# EAGLE board 227_arrayrelay (EAGLE 9.6.0)
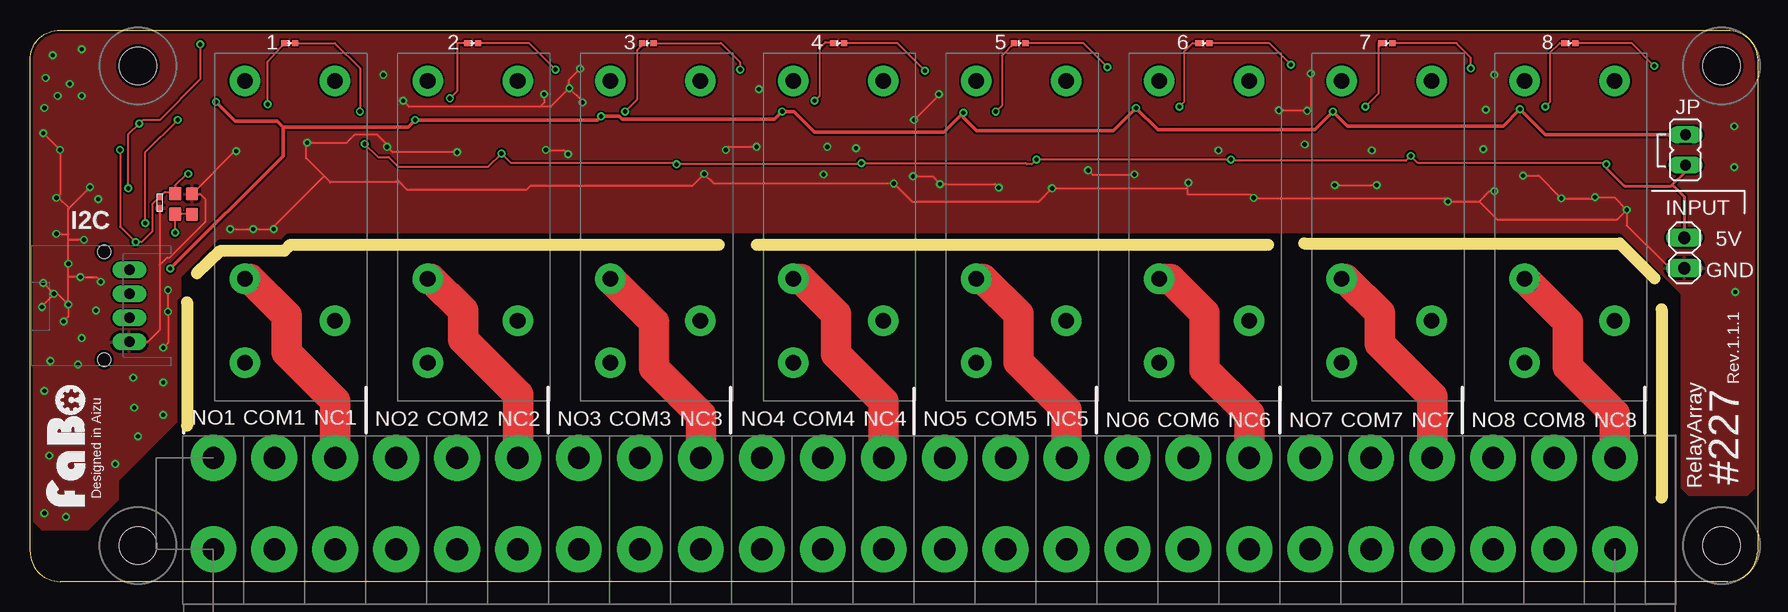
[diagram p0: board, top side]
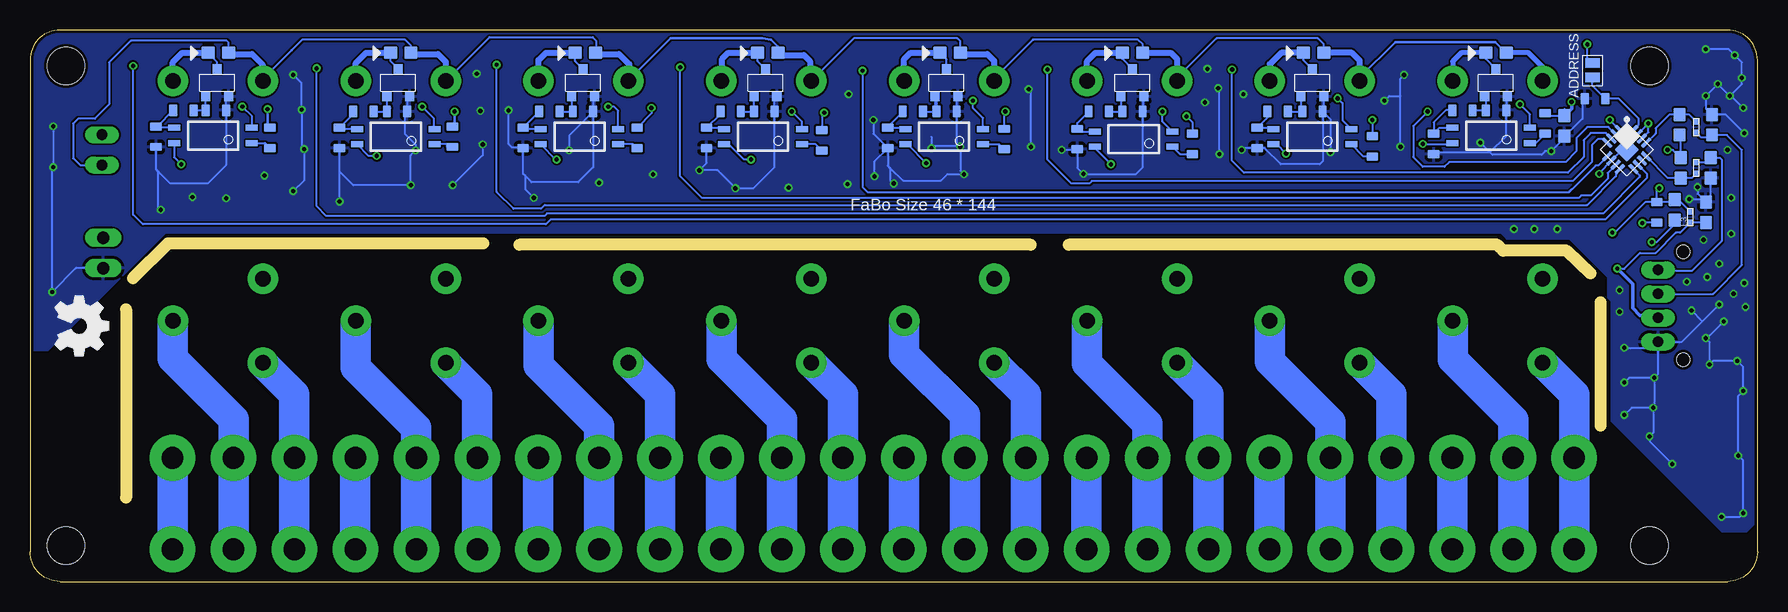
[diagram p1: board, bottom side, seen from below]

Size 144 x 46 mm. Coordinates in mm from the lower left corner, seen from the top.
Outline: 0,2.5 0,43.5 arc-90 2.5,46 141.5,46 arc-90 144,43.5 144,2.5 arc-90 141.5,0 2.5,0 arc-90 0,2.5
Copper layers (1*16): Top 0.035mm / dielectric 1.5mm / Bottom 0.035mm
Design rules "SeeedStudio_2layer_DRU_no_angle_20140221": minimum track width 6mil, minimum drill 12mil, track to track 6mil, track to pad 6mil, pad to pad 6mil, via to via 6mil, smd to smd 0mil, copper to edge 10mil, drill to drill 10mil, minimum pad ring 10mil, minimum via ring 6mil, stop-mask expansion 2mil, vias tented up to drill 100mil, thermal gap 10mil
Holes 3.1 mm at 9,3 9,43 141,43 141,3
bRestrict: 1 lines
Milling: 9 lines

## Footprints (pad centres in the part's own frame; a part is rotated, then mirrored left to right if it is on the bottom)
0603 = smd 1.1 x 1: 1 -0.85,0; 2 0.85,0
TBL004-508 = drill 1.8 pad 3.81: P$1 0,3.81; P$2 0,-3.81
0603' = smd 1.1 x 1: ANODE -0.85,0; CATHODE 0.85,0
NXP-PCAL6408A = smd 1 x 0.3: 1 -1.55,0.75; 2 -1.55,0.25; 3 -1.55,-0.25; 4 -1.55,-0.75; 9 1.55,-0.75; 10 1.55,-0.25; 11 1.55,0.25; 12 1.55,0.75 | smd 0.3 x 1: 5 -0.75,-1.55; 6 -0.25,-1.55; 7 0.25,-1.55; 8 0.75,-1.55; 13 0.75,1.55; 14 0.25,1.55; 15 -0.25,1.55; 16 -0.75,1.55 | smd 1.5 x 1.5: 17 0,0
FABO_BRICK_I2C_S04B-PASK-2_LONG = drill 0.9 pad 1.422 long: GND -3,0; SCL 3,0; SDA 1,0; VCC -1,0 | hole 1.1: 4.5,2.1; -4.5,2.1
JP1 = drill 0.914 long: 1 0,-1.27; 2 0,1.27
1X02 = drill 1.016 long: 1 -1.27,0; 2 1.27,0
0402 = smd 0.5 x 0.5: P$1 -0.46,0; P$2 0.46,0
0402-NO_SILK = smd 0.5 x 0.5: ANODE -0.46,0; CATHODE 0.46,0
SUPERSOT-3 = smd 0.76 x 0.76: D 0,1.15; G -0.95,-1.15; S 0.95,-1.15
0603-NARROW = smd 0.71 x 1: 1 -0.85,0; 2 0.85,0
G2RL-1 = drill 1.3 pad 2.54: 1 -11.75,-3.75; 2 4.75,-3.75; 3 11.75,-3.75; 4 8.25,3.75; 5 -11.75,3.75
SMD-JUMPER-2-OPEN = smd 0.8 x 1.2: 1 -0.6,0; 2 0.6,0
11-3C1 = smd 1 x 0.5: 1 -3.24,0.635; 2 -3.24,-0.635; 3 3.24,-0.635; 4 3.24,0.635

## Placement (x,y rotation side)
C1  10uF  [0603]  13.51,31.48 270 top
C2  0.1uF  [0603]  16.1,38 90 bottom
C3  10uF  [0603]  4.3,30.8 270 bottom
C4  33pF  [0603]  3.8,38.1 270 bottom
C5  10uF  [0603]  6.9,31 90 bottom
C6  33pF  [0603]  3.9,34.5 90 bottom
C7  33pF  [0603]  6.5,38.1 90 bottom
C8  33pF  [0603]  6.4,34.5 270 bottom
C9  0.1uF  [0603]  12.1,31.5 270 top
COM1  TBL004-508  [TBL004-508]  20.36,6.5 0 top
COM2  TBL004-508  [TBL004-508]  35.6,6.5 0 top
COM3  TBL004-508  [TBL004-508]  50.84,6.5 0 top
COM4  TBL004-508  [TBL004-508]  66.08,6.5 0 top
COM5  TBL004-508  [TBL004-508]  81.32,6.5 0 top
COM6  TBL004-508  [TBL004-508]  96.56,6.5 0 top
COM7  TBL004-508  [TBL004-508]  111.8,6.5 0 top
COM8  TBL004-508  [TBL004-508]  127.04,6.5 0 top
D1  1N4188  [0603']  21.8,44.1 0 bottom
D2  1N4188  [0603']  37,44.1 0 bottom
D3  1N4188  [0603']  52.1,44.1 0 bottom
D4  1N4188  [0603']  67.3,44.1 0 bottom
D5  1N4188  [0603']  82.5,44.1 0 bottom
D6  1N4188  [0603']  97.7,44.1 0 bottom
D7  1N4188  [0603']  113.1,44.1 0 bottom
D8  1N4188  [0603']  128.3,44.1 0 bottom
IC1  [NXP-PCAL6408A]  10.9,36.02 315 bottom
J1  [FABO_BRICK_I2C_S04B-PASK-2_LONG]  8.29,23 90 top
JP2  [JP1]  138,36 180 top
JP3  [1X02]  137.9,27.4 270 top
L1  [0402]  5.1,34.5 270 bottom
L2  [0402]  5.1,37.9 90 bottom
L3  [0402]  5.6,30.4 90 bottom
L4  [0402]  10.8,31.6 90 top
LED1  [0402-NO_SILK]  21.66,44.9 0 top
LED2  [0402-NO_SILK]  36.9,44.9 0 top
LED3  [0402-NO_SILK]  51.5,44.9 0 top
LED4  [0402-NO_SILK]  67.38,44.9 0 top
LED5  [0402-NO_SILK]  82.5,44.9 0 top
LED6  [0402-NO_SILK]  97.86,44.9 0 top
LED7  [0402-NO_SILK]  113.1,44.9 0 top
LED8  [0402-NO_SILK]  128.34,44.9 0 top
M1  MOSFET-N_FDN335N  [SUPERSOT-3]  21.8,41.6 0 bottom
M2  MOSFET-N_FDN335N  [SUPERSOT-3]  37.1,41.6 0 bottom
M3  MOSFET-N_FDN335N  [SUPERSOT-3]  52.1,41.6 0 bottom
M4  MOSFET-N_FDN335N  [SUPERSOT-3]  67.6,41.6 0 bottom
M5  MOSFET-N_FDN335N  [SUPERSOT-3]  82.7,41.6 0 bottom
M6  MOSFET-N_FDN335N  [SUPERSOT-3]  97.9,41.6 0 bottom
M7  MOSFET-N_FDN335N  [SUPERSOT-3]  113.3,41.6 0 bottom
M8  MOSFET-N_FDN335N  [SUPERSOT-3]  128.4,41.6 0 bottom
NC1  TBL004-508  [TBL004-508]  25.44,6.5 0 top
NC2  TBL004-508  [TBL004-508]  40.68,6.5 0 top
NC3  TBL004-508  [TBL004-508]  55.92,6.5 0 top
NC4  TBL004-508  [TBL004-508]  71.16,6.5 0 top
NC5  TBL004-508  [TBL004-508]  86.4,6.5 0 top
NC6  TBL004-508  [TBL004-508]  101.64,6.5 0 top
NC7  TBL004-508  [TBL004-508]  116.88,6.5 0 top
NC8  TBL004-508  [TBL004-508]  132.12,6.5 0 top
R1  1.8K  [0603-NARROW]  24.6,39.3 0 bottom
R2  10K  [0603-NARROW]  21.8,39.3 180 bottom
R3  1K  [0603-NARROW]  27,36.5 90 bottom
R4  1K  [0603-NARROW]  17.7,38.2 270 bottom
R5  1.8K  [0603-NARROW]  40,39.2 0 bottom
R6  10K  [0603-NARROW]  37.1,39.2 180 bottom
R7  1K  [0603-NARROW]  41.7,37 90 bottom
R8  1K  [0603-NARROW]  32.1,36.3 270 bottom
R9  10k  [0603-NARROW]  13.55,40.28 0 bottom
R10  1.8K  [0603-NARROW]  54.9,39.2 0 bottom
R11  10K  [0603-NARROW]  52.1,39.2 180 bottom
R12  1K  [0603-NARROW]  56.7,36.9 90 bottom
R13  1K  [0603-NARROW]  47.1,36.5 270 bottom
R14  1.8K  [0603-NARROW]  70.4,39.2 0 bottom
R15  10K  [0603-NARROW]  67.6,39.2 180 bottom
R16  1K  [0603-NARROW]  72.5,37 90 bottom
R17  1K  [0603-NARROW]  62.8,36.9 270 bottom
R18  1.8K  [0603-NARROW]  85.6,39.2 0 bottom
R19  10K  [0603-NARROW]  82.8,39.2 180 bottom
R20  1K  [0603-NARROW]  87.6,37 90 bottom
R21  1K  [0603-NARROW]  78,36.8 270 bottom
R22  1.8K  [0603-NARROW]  100.7,39.2 0 bottom
R23  10K  [0603-NARROW]  97.9,39.2 180 bottom
R24  1K  [0603-NARROW]  102.9,37 90 bottom
R25  1K  [0603-NARROW]  93.4,37 270 bottom
R26  1.8K  [0603-NARROW]  116.2,39.2 0 bottom
R27  10K  [0603-NARROW]  113.4,39.2 180 bottom
R28  1K  [0603-NARROW]  118.2,37 90 bottom
R29  1K  [0603-NARROW]  108.8,37.1 270 bottom
R30  1.8K  [0603-NARROW]  131.2,39.3 0 bottom
R31  10K  [0603-NARROW]  128.5,39.3 180 bottom
R32  1K  [0603-NARROW]  133.5,37.1 90 bottom
R33  1K  [0603-NARROW]  124,37 270 bottom
R34  10k  [0603-NARROW]  8.4,30.8 90 bottom
RL1  G2RL-1  [G2RL-1]  21.66,30 270 top
RL2  G2RL-1  [G2RL-1]  36.9,30 270 top
RL3  G2RL-1  [G2RL-1]  52.14,30 270 top
RL4  G2RL-1  [G2RL-1]  67.38,30 270 top
RL5  G2RL-1  [G2RL-1]  82.62,30 270 top
RL6  G2RL-1  [G2RL-1]  97.86,30 270 top
RL7  G2RL-1  [G2RL-1]  113.1,30 270 top
RL8  G2RL-1  [G2RL-1]  128.34,30 270 top
SJ1  OPEN  [SMD-JUMPER-2-OPEN]  13.76,42.63 270 bottom
U1  TLP291A  [11-3C1]  37.1,37.1 180 bottom
U2  TLP291A  [11-3C1]  52,36.9 180 bottom
U3  TLP291A  [11-3C1]  67.8,37.1 180 bottom
U4  TLP291A  [11-3C1]  22.2,37.2 180 bottom
U5  TLP291A  [11-3C1]  82.9,37.1 180 bottom
U6  TLP291A  [11-3C1]  98.2,37.1 180 bottom
U7  TLP291A  [11-3C1]  113.5,37.1 180 bottom
U8  TLP291A  [11-3C1]  128.74,37.2 180 bottom
U$2  [LOGO_OSHW_M]  139.9,21.3 270 bottom
U$4  [LOGO_FABO_MS]  4.97,11.33 90 top
U$7  TBL004-508  [TBL004-508]  15.28,6.5 0 top
U$9  TBL004-508  [TBL004-508]  30.52,6.5 0 top
U$12  TBL004-508  [TBL004-508]  45.76,6.5 0 top
U$15  TBL004-508  [TBL004-508]  61,6.5 0 top
U$18  TBL004-508  [TBL004-508]  76.24,6.5 0 top
U$21  TBL004-508  [TBL004-508]  91.48,6.5 0 top
U$24  TBL004-508  [TBL004-508]  106.72,6.5 0 top
U$27  TBL004-508  [TBL004-508]  121.96,6.5 0 top

## Library data of the parts
C1-C9 = FaBo-Capacitor
COM1-COM8 NC1-NC8 U$7 U$9 U$12 U$15 U$18 U$21 U$24 U$27 = FaBo-Terminal
D1-D8 = FaBo-Diode
IC1 = FaBo-Mems
J1 = FaBo-Template
JP2 = jumper
JP3 = pinhead
L1-L4 = FaBo-Coil
LED1-LED8 = FaBo-LED
M1-M8 = FaBo-Mosfet
R1-R34 = FaBo-Resistors
RL1-RL8 = FaBo-Relay
SJ1 = FaBo-Supply
U1-U8 = FaBo_Photocoupler
U$2 = FaBo-Logo
U$4 = FaBo-etc

## Nets
+5V: D1.CATHODE D2.CATHODE D3.CATHODE D4.CATHODE D5.CATHODE D6.CATHODE D7.CATHODE D8.CATHODE JP2.2 JP3.1 RL1.1 RL2.1 RL3.1 RL4.1 RL5.1 RL6.1 RL7.1 RL8.1 U1.4 U2.4 U3.4 U4.4 U5.4 U6.4 U7.4 U8.4
ADDRESS: IC1.16 R9.2 SJ1.2
GND: C1.1 C2.1 C3.1 C4.1 C6.1 J1.GND JP3.2 L4.P$1 M1.S M2.S M3.S M4.S M5.S M6.S M7.S M8.S R2.1 R3.1 R6.1 R7.1 R9.1 R11.1 R12.1 R15.1 R16.1 R19.1 R20.1 R23.1 R24.1 R27.1 R28.1 R31.1 R32.1
GPIO0: IC1.2 LED1.CATHODE
GPIO1: IC1.3 LED2.CATHODE
GPIO2: IC1.4 LED3.CATHODE
GPIO3: IC1.5 LED4.CATHODE
GPIO4: IC1.7 LED5.CATHODE
GPIO5: IC1.8 LED6.CATHODE
GPIO6: IC1.9 LED7.CATHODE
GPIO7: IC1.10 LED8.CATHODE
N$2: D1.ANODE M1.D RL1.5
N$3: R1.1 R3.2 U4.3
N$4: M1.G R1.2 R2.2
N$5: LED1.ANODE U4.2
N$6: D2.ANODE M2.D RL2.5
N$7: R4.2 U4.1
N$8: NC1.P$1 NC1.P$2 RL1.2
N$9: COM1.P$1 COM1.P$2 RL1.4
N$10: RL1.3 U$7.P$1 U$7.P$2
N$11: R5.1 R7.2 U1.3
N$12: M2.G R5.2 R6.2
N$13: NC2.P$1 NC2.P$2 RL2.2
N$14: COM2.P$1 COM2.P$2 RL2.4
N$15: RL2.3 U$9.P$1 U$9.P$2
N$16: LED2.ANODE U1.2
N$17: R8.2 U1.1
N$18: D3.ANODE M3.D RL3.5
N$19: R10.1 R12.2 U2.3
N$20: M3.G R10.2 R11.2
N$21: NC3.P$1 NC3.P$2 RL3.2
N$22: COM3.P$1 COM3.P$2 RL3.4
N$23: RL3.3 U$12.P$1 U$12.P$2
N$24: LED3.ANODE U2.2
N$25: R13.2 U2.1
N$26: D4.ANODE M4.D RL4.5
N$27: R14.1 R16.2 U3.3
N$28: M4.G R14.2 R15.2
N$29: NC4.P$1 NC4.P$2 RL4.2
N$30: COM4.P$1 COM4.P$2 RL4.4
N$31: RL4.3 U$15.P$1 U$15.P$2
N$32: LED4.ANODE U3.2
N$33: R17.2 U3.1
N$34: D5.ANODE M5.D RL5.5
N$35: R18.1 R20.2 U5.3
N$36: M5.G R18.2 R19.2
N$37: NC5.P$1 NC5.P$2 RL5.2
N$38: COM5.P$1 COM5.P$2 RL5.4
N$39: RL5.3 U$18.P$1 U$18.P$2
N$40: LED5.ANODE U5.2
N$41: R21.2 U5.1
N$42: D6.ANODE M6.D RL6.5
N$43: R22.1 R24.2 U6.3
N$44: M6.G R22.2 R23.2
N$45: NC6.P$1 NC6.P$2 RL6.2
N$46: COM6.P$1 COM6.P$2 RL6.4
N$47: RL6.3 U$21.P$1 U$21.P$2
N$48: LED6.ANODE U6.2
N$49: R25.2 U6.1
N$50: D7.ANODE M7.D RL7.5
N$51: R26.1 R28.2 U7.3
N$52: M7.G R26.2 R27.2
N$53: NC7.P$1 NC7.P$2 RL7.2
N$54: COM7.P$1 COM7.P$2 RL7.4
N$55: RL7.3 U$24.P$1 U$24.P$2
N$56: LED7.ANODE U7.2
N$57: R29.2 U7.1
N$58: D8.ANODE M8.D RL8.5
N$59: R30.1 R32.2 U8.3
N$60: M8.G R30.2 R31.2
N$61: NC8.P$1 NC8.P$2 RL8.2
N$62: COM8.P$1 COM8.P$2 RL8.4
N$63: RL8.3 U$27.P$1 U$27.P$2
N$64: LED8.ANODE U8.2
N$65: R33.2 U8.1
N$66: IC1.1 R34.1
N$70: C8.2 IC1.12 L1.P$2
N$71: C7.2 IC1.13 L2.P$2
N$72: C1.2 C5.2 C9.2 IC1.14 IC1.15 L3.P$2 R34.2 SJ1.1
N$73: C5.1 C7.1 C8.1 C9.1 IC1.6 IC1.17 L4.P$2
SCL: C6.2 J1.SCL L1.P$1
SDA: C4.2 J1.SDA L2.P$1
VCC: C2.2 C3.2 J1.VCC JP2.1 L3.P$1 R4.1 R8.1 R13.1 R17.1 R21.1 R25.1 R29.1 R33.1

## Tracks (layer width: path | path; a pad name or v marks a point on that pad's centre or on a via)
+5V  (via drill 0.35)
  Top 0.152: v131.4,34.8 131.3,34.9 115.7,34.9 v115.1,35.5 114.7,35.1 100.2,35.1 v100.1,35.2 v83.9,35.2 83.5,34.8 83.1,34.8 83,34.9 v69.3,34.9 69.2,34.8 v53.9,34.8 53.8,34.9 40.1,34.9 v39.3,35.7 38.2,34.6 30.7,34.6 29.9,35.4 29,35.4 v27.9,36.5
  Top 0.254: v131.4,34.8 131.4,34.5 132.9,33 136.8,33 136.9,33.1 | 136.9,33.1 138,34.2 JP2.2 | 136.9,33.1 137.9,32.1 JP3.1
  Bottom 0.152: U8.4 131.98,35.38 v131.4,34.8 | U1.4 40.06,36.47 v39.3,35.7 | v53.9,34.8 55.24,36.14 U2.4 | U3.4 70.86,36.47 v69.3,34.9 | v83.9,35.2 84.5,35.2 85.77,36.47 U5.4 | v100.1,35.2 100.14,35.16 U6.4 | U7.4 115.78,35.5 v115.1,35.5 | 33.3,41.9 RL2.1 | 109.35,41.85 RL7.1 105.7,45.4 97.1,45.4 96.8,45.1 96.8,44.1 | U4.4 25.5,36.5 v27.9,36.5 | 60.4,45.2 51.65,45.2 51.25,44.8 D3.CATHODE 50.74,44.1 | RL3.1 48.52,41.88 45.1,45.3 36.65,45.3 36.15,44.8 D2.CATHODE | 81.22,44.1 D5.CATHODE | D4.CATHODE 66.45,45.05 66.7,45.3 75.32,45.3 78.81,41.81 RL5.1 | 111.7,44.1 D7.CATHODE 112.25,44.7 112.75,45.2 121.3,45.2 122.2,44.3 | 126.94,44.1 D8.CATHODE 127.45,44.95 127.6,45.1 135.6,45.1 137.4,43.3 137.4,39.8 138.6,38.6 140,38.6 140.4,38.2 140.4,35.3 139.83,34.73 JP2.2 | 96.46,44.1 96.8,44.1 | 96.8,44.1 D6.CATHODE
  Bottom 0.2: 30.2,45 33.15,42.05 RL2.1
  Bottom 0.203: RL8.1 124.62,41.78 124.67,41.83 122.2,44.3 | RL4.1 63.74,41.86 60.4,45.2 | D1.CATHODE 21.85,45 30.2,45 | D2.CATHODE 36.45,44.2 | D5.CATHODE 81.65,44.6 82.22,45.17 82.95,45.3 90.6,45.3 94.05,41.85 94.13,41.77 RL6.1
  Bottom 0.406: RL1.1 17.91,42.91 19.1,44.1 D1.CATHODE
  Bottom 0.508: RL2.1 33.15,43.45 33.8,44.1 D2.CATHODE | D8.CATHODE 127.35,44 125.5,44 124.62,43.12 124.62,41.78 | D7.CATHODE 112.15,44 110,44 109.35,43.35 RL7.1 | D6.CATHODE 96.75,44 94.9,44 94.05,43.15 94.05,41.85 | D5.CATHODE 81.45,43.9 79.5,43.9 79,43.4 79,42 78.81,41.81 | D4.CATHODE 66.35,44 64.2,44 63.63,43.43 RL4.1 | D3.CATHODE 48.9,44.1 48.39,43.59 RL3.1
ADDRESS
  Bottom 0.152: IC1.16 9.9,38.09 9.9,38.6 11.58,40.28 R9.2 13.76,41.34 SJ1.2
GND  (via drill 0.35)
  Top 0.152: 30.7,33.4 30.8,33.3 | 30.8,33.3 31.4,32.7 41.4,32.7 41.7,33 55.2,33 v56.2,34 57,33.2 v72,33.2 73.5,31.7 84.1,31.7 v85.2,32.8 96.5,32.8 | 120.8,31.7 v118.2,31.7 117.9,32 v102,32 101.7,32.3 96.5,32.3 96.5,32.8 | 120.8,31.7 122.3,30.2 132.3,30.2 v133.1,31 | v133.1,31 133.1,29.7 136.67,26.13 JP3.2 | v35.6,35.8 30.21,35.8 v29.76,36.26 29.76,36.44 28.9,37.3 27.1,37.3 26.4,36.6 v23.1,36.6 23,36.5 23,35.3 24.5,33.8 | v44.96,41.16 43.4,39.6 42.5,39.6 | v31.1,40.1 31.6,39.6 42.5,39.6 | v58,36 58.26,36.26 v60.56,36.26 | v73.6,33.8 75.21,33.8 v75.86,33.16 80.46,33.16 v80.76,32.86 | v75.76,40.66 75.76,40.56 v73.7,38.5 | v88.2,34.3 88.54,33.96 v92.06,33.96 | 96.5,32.8 96.5,33.2 v96.56,33.26 | v106.76,42.36 106.76,39.56 106.5,39.3 | 106.5,39.3 v106.46,39.26 | v104.1,39.3 106.5,39.3 | v108.76,33.06 v112.26,33.06 | 120.8,31.7 121.66,32.56 v122.06,32.56 | v133.1,31 132.04,32.06 v130.46,32.06 130.36,31.96 v127.66,31.96 125.76,33.86 v124.46,33.86 | v3.2,23.1 3.2,25.4 | 3.2,25.4 v3.2,26.5 3.2,28.4 | 3.2,28.4 3.2,29 | 3.2,29 3.2,31.1 3.25,31.15 | 3.25,31.15 v5,32.9 | 3.25,31.15 2.4,32 v2.2,32 2.5,32.3 v2.5,36 v1.1,37.4 | v2.2,29 3.2,29 | 3.2,25.4 v4.2,25.4 5.5,25.4 v5.9,25 | v1,22.9 1,23 v2,24 | v2,24 v1.1,24.9 | v2,24 2.3,24 v3.2,23.1 | v3.2,23.1 3.2,22.1 v2.8,21.7 | L4.P$1 10.8,26.4 | 10.8,26.4 10.8,21 9.8,20 J1.GND | 10.8,26.4 11.4,27 11.6,27 14.6,30 14.6,31.9 14.17,32.33 C1.1 17.08,35.9 v17.2,35.9 | v4.5,28.5 3.3,28.5 3.2,28.4 | v43,36 44.51,36 v44.86,35.66 | 30.8,33.3 25,33.3 24.5,33.8 | v11.5,24.3 v11.5,22.5 11.5,19.9 v11.1,19.5 | v16.7,29.4 v18.6,29.4 v20.3,29.4 20.3,29.6 24.5,33.8 | v42.86,40.66 42.86,39.96 42.5,39.6
  Top 0.152: v44.96,41.16 44.96,41.86 v45.86,42.76 | v44.96,41.16 46.06,40.06 v46.06,39.96
  Bottom 0.152: 41.5,35.95 R7.1 | 66.85,39.3 66.78,39.23 | 66.78,39.23 R15.1 | R16.1 72.5,34.7 72.3,34.5 | 72.3,34.5 72.3,33.5 v72,33.2 | 82.15,39.4 R19.1 | 97.25,39.4 R23.1 | 127.85,39.5 R31.1 | R31.1 127.65,34.75 129.2,33.2 132.3,33.2 133.3,34.2 | 133.3,34.2 133.5,34.4 R32.1 | 112.76,38.99 112.85,38.9 | R23.1 97.05,34.55 98.3,33.3 102.2,33.3 102.7,33.8 | 102.7,33.8 102.9,34 R24.1 102.95,36.2 103.8,36.2 104.1,36.5 v104.1,39.3 | R19.1 81.95,34.55 83.7,32.8 v85.2,32.8 86.7,34.3 v88.2,34.3 87.6,34.9 R20.1 | 72.3,34.5 71.2,33.4 68.1,33.4 67.54,33.96 v66.16,33.96 66.46,34.26 v66.46,36.26 | R6.1 36.25,35.05 36.5,34.8 39.75,34.8 41.1,36.15 R7.1 | v102,32 102.7,32.7 102.7,33.8 | v118.2,31.7 R28.1 118.2,34.2 117.06,33.06 v112.26,33.06 112.26,35.56 v111.86,35.96 111.86,36.46 112.76,37.36 112.76,38.99 | v133.1,31 133.3,31.2 133.3,34.2 | v29.76,36.26 29.76,40.5 | 29.76,40.5 29.76,41.96 v29.46,42.26 | R6.1 35.6,38.55 v35.6,35.8 | v44.86,35.66 44.86,41.06 v44.96,41.16 | v31.1,40.1 30.7,40.5 29.76,40.5 | v60.56,36.26 60.56,40.86 v60.76,41.06 | v58,36 56.75,36 R12.1 56.7,34.5 v56.2,34 51.8,34 51.25,34.55 R11.1 51.25,40.35 M3.S | v73.6,33.8 73.6,35.05 R16.1 | v73.7,38.5 73.7,37.35 R16.1 | R23.1 99.06,37.19 v99.06,35.96 | R27.1 112.58,39.17 | 112.58,39.17 112.76,38.99 | v122.06,32.56 121.16,33.46 v121.16,36.06 121.36,36.26 v121.36,39.36 121.36,41.56 v122.06,42.26 | 68.86,37.09 68.86,36.3 | 68.86,36.3 v68.86,36.16 | 66.46,38.91 R15.1 | M1.S 20.95,40.35 R2.1 21,39.25 21,37.1 22.3,35.8 | R3.1 26.85,35.8 22.3,35.8 | C6.1 3.9,32.05 C3.1 4.55,31.9 | 4.6,21.7 6.3,20 J1.GND 8.29,19.8 | 4.6,21.7 v3.2,23.1 | v5,32.9 5,32.35 4.55,31.9 | v1.1,37.4 2.65,38.95 C4.1 4.3,39.45 v4.3,40.5 v3.3,41.5 v2.3,40.5
  Bottom 0.152: v1.2,39.5 2.2,40.5 v2.3,40.5 | R9.1 14.6,40.08 14.6,38.6 16.05,37.15 C2.1 16.1,37 v17.2,35.9 17.7,35.9 18,35.6 22.1,35.6 22.3,35.8 | v5.7,31.9 4.55,31.9 | R7.1 42.85,36.15 v43,36 | M4.S 66.78,40.33 66.78,39.23 | v66.46,36.26 66.5,36.3 68.86,36.3 | v66.46,36.26 66.75,36.55 R15.1 | v3,5.4 1.5,5.4 v1.2,5.7 1.2,10.1 v1.6,10.5 1.6,15.5 v1.2,15.9 1.2,17.9 v1.7,18.4 3.7,18.4 v4,18.1 4,20 v4.3,20.3 4.2,20.3 v2.8,21.7 | v8.6,17 10.7,17 v11.1,16.6 | v8.6,17 8.6,14.6 v8.7,14.5 | v8.7,14.5 8.7,12.4 v9,12.1 9,11.7 v7.1,9.8 | v8.7,14.5 10.5,14.5 v11.1,13.9 | v8.6,17 8.29,17.32 8.29,19.8 | v11.1,19.5 8.59,19.5 8.29,19.8 | v5.5,22.6 4.6,21.7 | R19.1 81.95,40.25 M5.S | M6.S 97.05,40.35 R23.1 | R31.1 127.65,40.25 M8.S | 22.3,35.8 v23.1,36.6 | R6.1 36.15,39.3 M2.S | M7.S 112.58,40.23 112.58,39.17 | v2.3,40.5 1.3,41.5 v1.3,42 1.3,43.3 v1.9,43.9 2.4,44.4 v4.3,44.4 | JP3.2 140.18,26.13 v142.16,24.16 142.16,34.46 v142.06,34.56 v142.06,37.96 | v106.26,36.46 106.26,35.56 v108.76,33.06
  pour Bottom: -1,45.1 1.8,47.9 144.4,47.9 146,46.3 146,19.6 145.7,19.3 142.5,19.3 132.7,29.1 21.4,29.1 20.9,28.6 15.7,28.6 12.5,25.4 12.5,23.7 12.2,23.4 12.2,13.4 3,4.2 0.9,4.2 -1,6.1
  pour Top: -0.5,44.9 2.9,48.3 144.6,48.3 146.6,46.3 146.6,26.5 145.1,25 145.1,9.2 143.1,7.2 138.3,7.2 137.7,7.8 137.7,24 132.6,29.1 21.4,29.1 20.9,28.6 15.7,28.6 12.5,25.4 12.5,23.8 12.2,23.5 12.2,13.3 7.3,8.4 7.3,6.8 4.8,4.3 1,4.3 -0.5,5.8
GPIO0  (via drill 0.35)
  Top 0.152: LED1.CATHODE 25.4,44.9 27.5,42.8 v27.5,39.2
  Bottom 0.152: v27.5,39.2 28.7,38 28.7,35.4 27.9,34.6 26.1,34.6 25.7,35 16,35 15.1,35.9 15.1,37 14.2,37.9 12.42,37.9 IC1.2
GPIO1  (via drill 0.35)
  Top 0.152: v43.8,42.7 41.6,44.9 LED2.CATHODE
  Bottom 0.152: v43.8,42.7 43.8,35.1 42.8,34.1 15.8,34.1 14.5,35.4 14.5,36.8 13.9,37.4 12.63,37.4 IC1.3
GPIO2  (via drill 0.35)
  Top 0.152: LED3.CATHODE 57.6,44.9 59.2,43.3 v59.2,42.7
  Bottom 0.152: v59.2,42.7 59.2,35.2 57.2,33.2 55.7,33.2 55.5,33.4 15.4,33.4 13.8,35 13.8,36.4 13.3,36.9 12.84,36.9 IC1.4
GPIO3  (via drill 0.35)
  Top 0.152: v74.6,42.6 72.3,44.9 LED4.CATHODE
  Bottom 0.152: v74.6,42.6 74.6,32.9 74.2,32.5 15.7,32.5 15.6,32.6 15.45,32.75 13.5,34.7 13.29,34.7 IC1.5
GPIO4  (via drill 0.35)
  Top 0.152: v89.8,42.9 87.8,44.9 LED5.CATHODE
  Bottom 0.152: v89.8,42.9 89.8,33.8 88,32 14.9,32 14.7,32.2 13.9,32.2 12.5,33.6 12.5,34.07 IC1.7
GPIO5  (via drill 0.35)
  Top 0.152: v105.1,43.1 103.3,44.9 LED6.CATHODE
  Bottom 0.152: v105.1,43.1 105.1,32.5 103.7,31.1 101.4,31.1 101.1,31.4 14.2,31.4 11.8,33.8 11.8,34.06 IC1.8
GPIO6  (via drill 0.35)
  Top 0.152: v120.1,42.8 120.1,43.7 118.9,44.9 LED7.CATHODE
  Bottom 0.152: v120.1,42.8 120.1,31.3 119.3,30.5 101.1,30.5 100.9,30.7 12.87,30.7 9.8,33.77 9.8,33.86 IC1.9
GPIO7  (via drill 0.35)
  Top 0.152: v135.4,43 133.5,44.9 LED8.CATHODE
  Bottom 0.152: v135.4,43 135.4,30.6 134.6,29.8 101,29.8 100.6,30.2 12.7,30.2 9.2,33.7 9.2,33.97 IC1.10
N$2
  Bottom 0.152: M1.D 22.65,43.6 D1.ANODE
  Bottom 0.406: D1.ANODE 24.7,44.1 25.41,43.39 RL1.5
N$3
  Bottom 0.152: R1.1 26,39.3 27,38.3 R3.2 26.52,37.84 U4.3
N$4
  Bottom 0.152: M1.G 22.65,40.35 R2.2 R1.2
N$5  (via drill 0.35)
  Top 0.152: v19.8,39.8 19.8,43.36 LED1.ANODE
  Bottom 0.152: U4.2 18.96,38.96 v19.8,39.8
N$6
  Bottom 0.152: 38.41,43.99 D2.ANODE 37.85,43.5 M2.D
  Bottom 0.508: D2.ANODE 39.7,44.1 40.65,43.15 RL2.5
N$7
  Bottom 0.152: U4.1 18.48,36.56 R4.2
N$8
  Top 2.54: NC1.P$1 25.44,15.06 21.4,19.1 21.4,22.2 18.35,25.25 RL1.2
  Bottom 2.54: NC1.P$1 NC1.P$2
N$9
  Bottom 2.54: COM1.P$2 COM1.P$1 20.36,13.46 25.41,18.51 RL1.4
N$10
  Bottom 2.54: U$7.P$2 U$7.P$1 15.28,15.62 RL1.3
N$11
  Bottom 0.152: R5.1 40.85,38.7 R7.2 40.45,37.85 U1.3
N$12
  Bottom 0.152: 37.75,39.4 37.88,39.27 | 37.88,39.27 R6.2 R5.2 | M2.G 38.05,39.45 37.88,39.27
N$13
  Top 2.54: NC2.P$1 40.68,15.62 36.1,20.2 36.1,22.6 33.45,25.25 RL2.2
  Bottom 2.54: NC2.P$1 NC2.P$2
N$14
  Bottom 2.54: COM2.P$2 COM2.P$1 35.6,13.3 40.65,18.35 RL2.4
N$15
  Bottom 2.54: U$9.P$2 U$9.P$1 30.52,15.62 RL2.3
N$16  (via drill 0.35)
  Top 0.152: LED2.ANODE 35.6,44.9 35.6,40.9 v35,40.3
  Bottom 0.152: v35,40.3 34.6,39.9 34.6,38.48 U1.2
N$17
  Bottom 0.152: R8.2 32.84,35.45 U1.1
N$18
  Bottom 0.152: 53.54,44.1 D3.ANODE 52.95,43.6 M3.D
  Bottom 0.508: RL3.5 55.89,43.41 55.2,44.1 D3.ANODE
N$19
  Bottom 0.152: U2.3 56.48,37.53 R12.2 56.7,38.25 R10.1
N$20
  Bottom 0.152: R10.2 R11.2 53.05,39.3 M3.G
N$21
  Top 2.54: NC3.P$1 55.92,13.88 52,17.8 52,21.64 RL3.2
  Bottom 2.54: NC3.P$1 NC3.P$2
N$22
  Bottom 2.54: COM3.P$2 COM3.P$1 50.84,13.14 55.89,18.19 RL3.4
N$23
  Bottom 2.54: U$12.P$2 U$12.P$1 45.76,15.62 RL3.3
N$24  (via drill 0.35)
  Top 0.152: LED3.ANODE 51.2,44.9 50.6,44.3 50.6,40.2 v49.6,39.2
  Bottom 0.152: U2.2 49.6,38.38 v49.6,39.2
N$25
  Bottom 0.152: U2.1 48.15,35.65 R13.2
N$26
  Bottom 0.152: 70.85,41.75 RL4.5 | M4.D 67.6,43.55 D4.ANODE
  Bottom 0.508: RL4.5 71.13,43.57 70.6,44.1 D4.ANODE
N$27
  Bottom 0.152: R14.1 72.5,37.95 R16.2 71.16,37.85 U3.3
N$28
  Bottom 0.152: 68.45,40.45 R15.2 68.5,39.2 | R14.2 68.5,39.2 | M4.G 68.55,39.25 68.5,39.2
N$29
  Top 2.54: NC4.P$1 71.16,15.04 67.2,19 67.2,22.3 64.25,25.25 RL4.2
  Bottom 2.54: NC4.P$1 NC4.P$2
N$30
  Bottom 2.54: COM4.P$2 COM4.P$1 66.08,13.88 71.13,18.93 RL4.4
N$31
  Bottom 2.54: U$15.P$2 U$15.P$1 61,15.62 RL4.3
N$32  (via drill 0.35)
  Top 0.152: v65.4,40.1 65.8,40.5 65.8,44.5 66.3,45 66.94,45 LED4.ANODE
  Bottom 0.152: U3.2 64.56,38.66 65.4,39.5 v65.4,40.1
N$33
  Bottom 0.152: U3.1 63.22,36.47 R17.2
N$34
  Bottom 0.152: M5.D 83.35,43.4 D5.ANODE
  Bottom 0.508: RL5.5 86.3,41.82 86.3,43.6 85.8,44.1 D5.ANODE
N$35
  Bottom 0.152: U5.3 86.25,37.85 R20.2 86.45,39 R18.1
N$36
  Bottom 0.152: R18.2 R19.2 | R19.2 83.45,39.4 | R19.2 M5.G
N$37
  Top 2.54: NC5.P$1 86.4,14.3 82.4,18.3 82.4,22.3 79.45,25.25 RL5.2
  Bottom 2.54: NC5.P$1 NC5.P$2
N$38
  Bottom 2.54: COM5.P$2 COM5.P$1 81.32,13.52 86.37,18.57 RL5.4
N$39
  Bottom 2.54: RL5.3 76.24,15.62 U$18.P$1 U$18.P$2
N$40  (via drill 0.35)
  Top 0.152: v80.5,39.2 81,39.7 81,43.86 LED5.ANODE
  Bottom 0.152: U5.2 79.66,38.36 v80.5,39.2
N$41
  Bottom 0.152: R21.2 78.52,36.47 U5.1
N$42
  Bottom 0.152: M6.D 98.55,43.4 D6.ANODE
  Bottom 0.508: RL6.5 101.61,43.49 101,44.1 D6.ANODE
N$43
  Bottom 0.152: U6.3 102.78,37.73 R24.2 R22.1
N$44
  Bottom 0.152: R22.2 R23.2 98.72,39.23 | 98.72,39.23 98.55,39.4 | M6.G 98.85,39.35 98.72,39.23
N$45
  Top 2.54: NC6.P$1 101.64,13.96 97.9,17.7 97.9,22.4 95.05,25.25 RL6.2
  Bottom 2.54: NC6.P$1 NC6.P$2
N$46
  Bottom 2.54: COM6.P$2 COM6.P$1 96.56,12.96 101.61,18.01 RL6.4
N$47
  Bottom 2.54: U$21.P$2 U$21.P$1 91.48,15.62 RL6.3
N$48  (via drill 0.35)
  Top 0.152: v95.8,39.6 96.2,40 96.2,44.2 96.9,44.9 LED6.ANODE
  Bottom 0.152: U6.2 94.96,39.26 95.3,39.6 v95.8,39.6
N$49
  Bottom 0.152: R25.2 93.72,36.47 U6.1
N$50
  Bottom 0.152: M7.D 113.95,43.4 D7.ANODE
  Bottom 0.508: RL7.5 116.85,43.25 116,44.1 D7.ANODE
N$51
  Bottom 0.152: U7.3 118.08,37.73 R28.2 117.05,39 R26.1
N$52
  Bottom 0.152: R26.2 R27.2 | R27.2 113.95,39.5 | R27.2 M7.G
N$53
  Top 2.54: NC7.P$1 116.88,15.42 112.5,19.8 112.5,22.4 109.65,25.25 RL7.2
  Bottom 2.54: NC7.P$1 NC7.P$2
N$54
  Bottom 2.54: COM7.P$2 COM7.P$1 111.8,12.8 116.85,17.85 RL7.4
N$55
  Bottom 2.54: U$24.P$2 U$24.P$1 106.72,15.62 RL7.3
N$56  (via drill 0.35)
  Top 0.152: v111.3,39.6 112.4,40.7 112.4,44.9 LED7.ANODE
  Bottom 0.152: U7.2 110.36,37.73 110.36,38.66 v111.3,39.6
N$57
  Bottom 0.152: R29.2 109.26,36.25 109.26,36.47 U7.1
N$58
  Bottom 0.152: D8.ANODE 129.2,44.1 | 129.2,44.1 129.5,44.1 129.74,44.1 | M8.D 128.4,43.3 129.2,44.1
  Bottom 0.508: RL8.5 132.09,43.31 131.3,44.1 129.5,44.1
N$59
  Bottom 0.152: R30.1 133.4,37.95 R32.2 133.38,37.84 U8.3
N$60
  Bottom 0.152: 129.15,39.5 R31.2 | R30.2 R31.2 | R31.2 M8.G
N$61
  Top 2.54: NC8.P$1 132.12,13.98 128.2,17.9 128.2,21.64 RL8.2
  Bottom 2.54: NC8.P$1 NC8.P$2
N$62
  Bottom 2.54: COM8.P$2 COM8.P$1 127.04,13.54 132.09,18.59 RL8.4
N$63
  Bottom 2.54: U$27.P$2 U$27.P$1 121.96,15.62 RL8.3
N$64  (via drill 0.35)
  Top 0.152: v126.3,39.6 126.7,40 126.7,44.1 127.5,44.9 LED8.ANODE
  Bottom 0.152: U8.2 125.5,38.8 v126.3,39.6
N$65
  Bottom 0.152: U8.1 124.42,36.56 R33.2
N$66  (via drill 0.35)
  Top 0.152: v9.6,29.9 9.6,35.8 v12.3,38.5
  Bottom 0.152: R34.1 9.55,29.95 v9.6,29.9 | v12.3,38.5 11.47,37.67 IC1.1
N$70
  Bottom 0.152: L1.P$2 5.49,33.65 C8.2 7.46,33.65 IC1.12
N$71
  Bottom 0.152: L2.P$2 5.69,38.95 C7.2 7.35,38.95 8.5,37.8 8.5,37.36 IC1.13
N$72  (via drill 0.35)
  Top 0.152: v8.2,32.8 8.2,37.3 v9.1,38.2 9.4,38.5 10.8,38.5 14.2,41.9 v14.2,44.8 | C1.2 12.2,30.63 | 12.2,30.63 12.12,30.63 C9.2 | v12.1,29.1 12.1,30.53 12.2,30.63
  Bottom 0.152: L3.P$2 6.59,31.85 C5.2 7.1,31.65 R34.2 | R34.2 8.4,32.6 v8.2,32.8 | IC1.15 9.98,37.32 v9.1,38.2 9.1,37.47 IC1.14 | R34.2 9.35,31.65 11.9,29.1 v12.1,29.1 | SJ1.1 14.2,43.68 v14.2,44.8
N$73  (via drill 0.35)
  Top 0.152: v13.2,34 13.05,34 12.1,33.05 12.1,32.5 | 12.1,32.5 C9.1 | 12.1,32.5 11.24,32.5 L4.P$2 10.2,31.46 10.2,29.2 9.3,28.3 v8.8,28.3 7.5,29.6 v7.5,36
  Bottom 0.152: v13.2,34 13.2,34.08 IC1.6 11.25,36.02 IC1.17 | C7.1 6.4,37.15 C8.1 7.05,36 v7.5,36 | v8.8,28.3 8.4,28.3 6.9,29.8 C5.1
SCL
  Bottom 0.152: L1.P$1 4.29,34.96 C6.2 3.15,35.35 3,35.2 3,28.4 5.5,25.9 8.19,25.9 J1.SCL
SDA
  Bottom 0.152: L2.P$1 4.71,37.05 4,37.05 C4.2 2.55,37.25 1.3,36 1.3,26.4 3.7,24 J1.SDA
VCC  (via drill 0.35)
  Top 0.152: 47.87,38.8 v47.6,38.8
  Top 0.305: v11.7,26.1 21.1,35.5 21.1,37.9 | 21.1,37.9 20.6,38.4 17.1,38.4 v15.5,40 | 21.1,37.9 31.5,37.9 v32.1,38.5 47.3,38.5 v47.6,38.8 49.11,38.8 49.34,38.57 62.07,38.57 v62.7,39.2 63.7,39.2 65.4,37.5 76.2,37.5 v77.8,39.1 77.8,38.7 78.9,37.6 90.3,37.6 v92.2,39.5 94,37.7 107.1,37.7 v108.6,39.2 109.8,38 122.8,38 v124.2,39.4 126.33,37.27 JP2.1
  Bottom 0.152: 17.7,38.9 R4.1 17.5,38.85 C2.2 16.1,39.4 | v32.1,38.5 R8.1 | v62.7,39.2 62.8,39.1 R17.1 | v77.8,39.1 78,38.9 R21.1 | C3.2 L3.P$1 6.44,29.1 6.8,29.1 8.5,27.4 9.8,27.4 11.1,26.1 v11.7,26.1 | v47.6,38.8 47.1,38.3 R13.1 | v92.2,39.5 92.2,39.05 93.38,37.88
  Bottom 0.203: v124.2,39.4 124.2,38.05 R33.1 | R29.1 108.6,38.15 v108.6,39.2 | 93.3,37.95 93.38,37.88 R25.1 | 17.7,39.1 R4.1
  Bottom 0.305: C2.2 15.5,39.45 v15.5,40 | J1.VCC 8.48,22.2 9.8,22.2 10.4,22.8 10.4,24.8 v11.7,26.1

## Text on the board
tPlace: 1 | 2 | 3 | 4 | 5 | 6 | 7 | 8 | JP | INPUT | I2C | 5V | GND | Rev.1.1.1 | NO1 | COM1 | NC1 | NO2 | COM2 | NC2 | NO3 | COM3 | NC3 | NO4 | COM4 | NC4 | NO5 | COM5 | NC5 | NO6 | COM6 | NC6 | NO7 | COM7 | NC7 | NO8 | COM8 | NC8 | #227 | Designed in Aizu | RelayArray
bPlace: ADDRESS | FaBo Size 46 * 144